# EAGLE board PTSymmetryController (EAGLE 9.5.1)
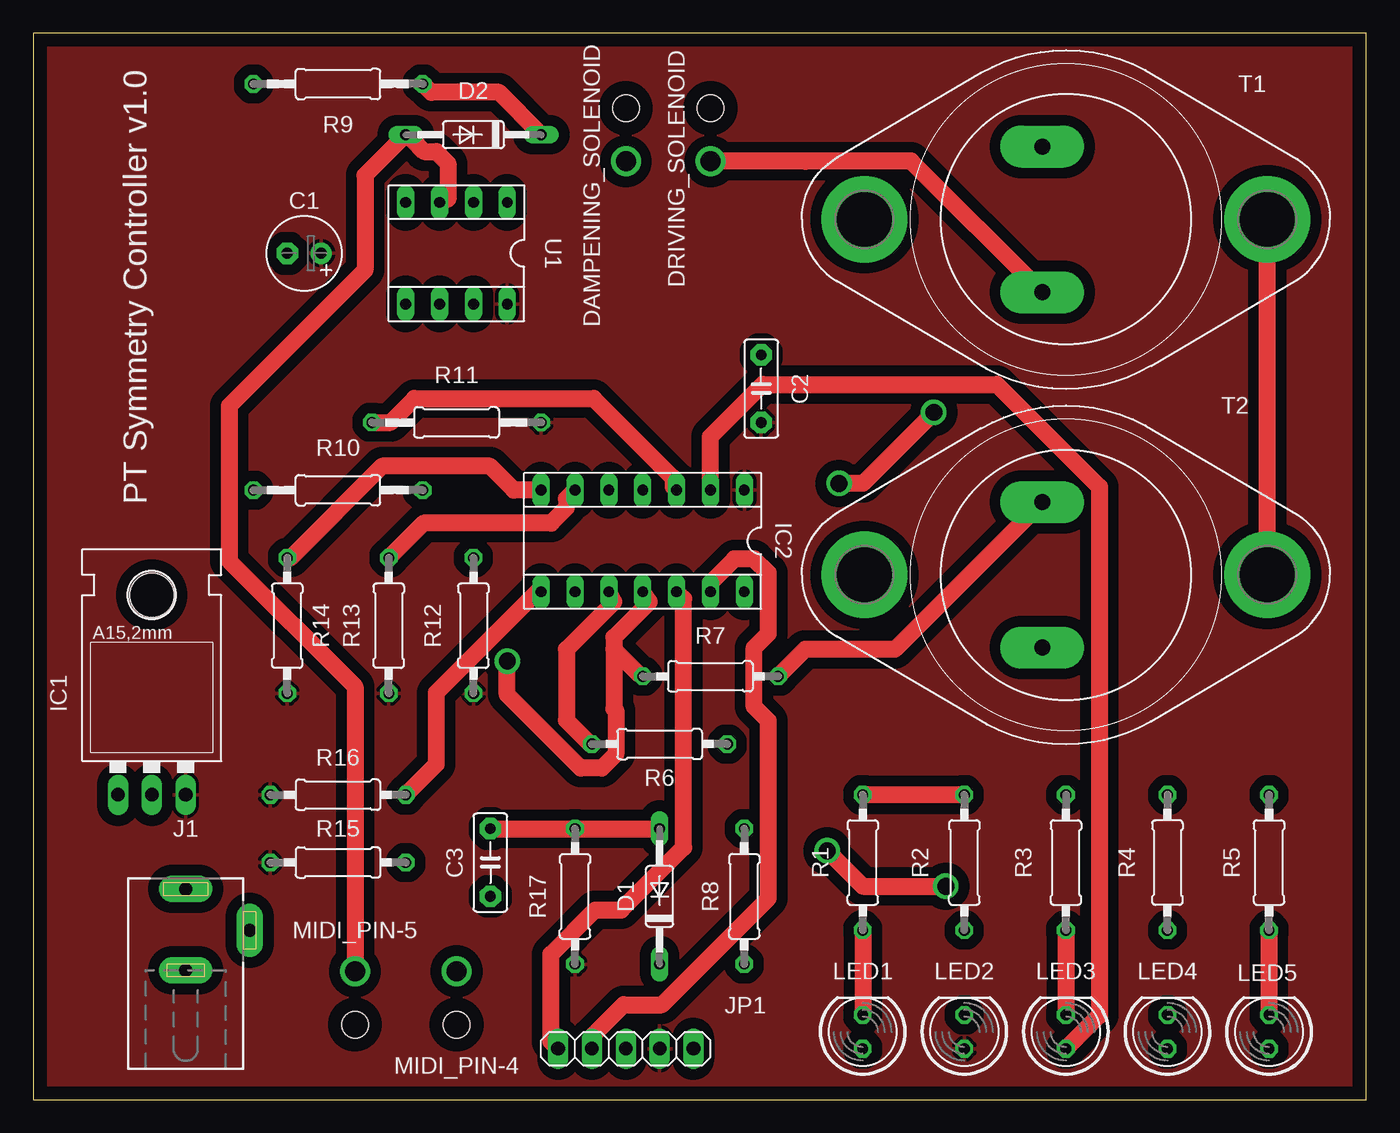
[diagram p0: board, top side]
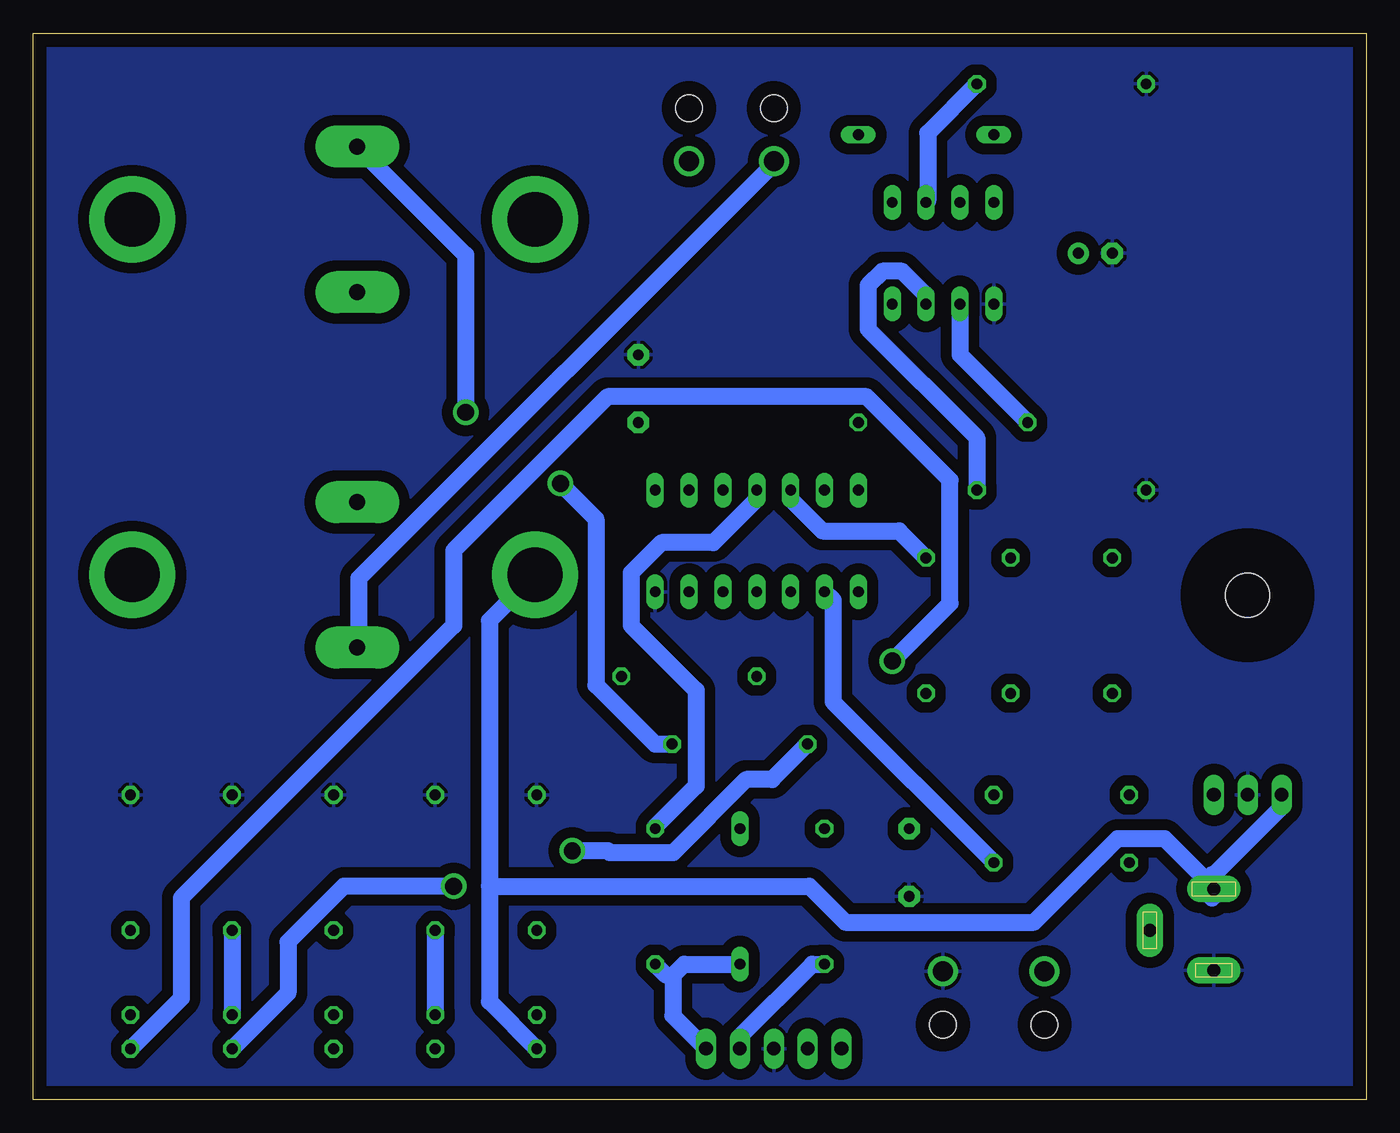
[diagram p1: board, bottom side, seen from below]

Size 100 x 80 mm. Coordinates in mm from the lower left corner, seen from the top.
Outline: 0,0 100,0 100,80 0,80 0,0
Copper layers (1*16): Top 0.035mm / dielectric 1.5mm / Bottom 0.035mm
Design rules "default": minimum track width 6mil, minimum drill 0.35mm, track to track 6mil, track to pad 6mil, pad to pad 6mil, via to via 6mil, smd to smd 6mil, copper to edge 40mil, drill to drill 6mil, minimum pad ring 10mil, minimum via ring 8mil, stop-mask expansion 4mil, vias tented up to drill 0mil, thermal gap 10mil
Net classes: 0 default: width 1.27 mm, drill 1.27 mm, clearance 0.508 mm; 2 signal: width 0.15 mm, drill 0.406 mm, clearance 0.127 mm; 3 ground: width 0.15 mm, drill 0.406 mm, clearance 0.127 mm; 4 3.3V: width 0.15 mm, drill 0.406 mm, clearance 0.127 mm

## Footprints (pad centres in the part's own frame; a part is rotated, then mirrored left to right if it is on the bottom)
SOCKET-08 = drill 0.813 long: 1 -3.81,-3.81; 2 -1.27,-3.81; 3 1.27,-3.81; 4 3.81,-3.81; 5 3.81,3.81; 6 1.27,3.81; 7 -1.27,3.81; 8 -3.81,3.81
E2,5-6 = drill 0.813 pad 1.6: + -1.27,0 | drill 0.813 pad 1.6 octagon: - 1.27,0
C5B2.5 = drill 0.813 pad 1.6 octagon: 1 -2.54,0; 2 2.54,0
DO35-10 = drill 0.813 long: A 5.08,0; C -5.08,0
DOUBLE_THROUGH_HOLE_PAD = drill 1.5: P$1 -2,0 | hole 2: 2,0
78XXL = drill 1.016 long: GND 0,-3.81; IN -2.54,-3.81; OUT 2.54,-3.81 | hole 3.302: 0,11.176
SOCKET-14 = drill 0.813 long: 1 -7.62,-3.81; 2 -5.08,-3.81; 3 -2.54,-3.81; 4 0,-3.81; 5 2.54,-3.81; 6 5.08,-3.81; 7 7.62,-3.81; 8 7.62,3.81; 9 5.08,3.81; 10 2.54,3.81; 11 0,3.81; 12 -2.54,3.81; 13 -5.08,3.81; 14 -7.62,3.81
DCJ0303 = drill 1 pad 2 long: 1 0,3.1; 2 4.8,0; 3 0,-3
1X05 = drill 1.016 long: 1 -5.08,0; 2 -2.54,0; 3 0,0; 4 2.54,0; 5 5.08,0
LED5MM = drill 0.813 octagon: A -1.27,0; K 1.27,0
0207/10 = drill 0.813 octagon: 1 -5.08,0; 2 5.08,0
0207/12 = drill 0.813 octagon: 1 -6.35,0; 2 6.35,0
TO3 = drill 1.194 pad 3.15 long: B -1.778,5.461; E -1.778,-5.461 | drill 4.115 pad 6.477: C 15.113,0; C/ -15.113,0

## Placement (x,y rotation side)
6N138  U1  [SOCKET-08]  31.75,63.5 180 top
C1  2.2u  [E2,5-6]  20.32,63.5 180 top
C2  0.1u  [C5B2.5]  54.61,53.34 270 top
C3  0.1u  [C5B2.5]  34.29,17.78 90 top
D1  1N4148  [DO35-10]  46.99,15.24 90 top
D2  1N4148  [DO35-10]  33.02,72.39 180 top
DAMPENING_SOLENOID  DOUBLE_THROUGH_HOLE_PAD  [DOUBLE_THROUGH_HOLE_PAD]  44.45,72.39 90 top
DRIVING_SOLENOID  DOUBLE_THROUGH_HOLE_PAD  [DOUBLE_THROUGH_HOLE_PAD]  50.8,72.39 90 top
IC1  MIC2954  [78XXL]  8.89,26.67 0 top
IC2  PIC16F18323  [SOCKET-14]  45.72,41.91 180 top
J1  [DCJ0303]  11.43,12.7 0 top
JP1  1x5x2mm-pinheader  [1X05]  44.45,3.81 180 top
LED1  Yellow  [LED5MM]  62.23,5.08 90 top
LED2  Red  [LED5MM]  69.85,5.08 90 top
LED3  Green  [LED5MM]  77.47,5.08 90 top
LED4  Orange  [LED5MM]  85.09,5.08 90 top
LED5  Orange  [LED5MM]  92.71,5.08 90 top
MIDI_PIN-4  DOUBLE_THROUGH_HOLE_PAD  [DOUBLE_THROUGH_HOLE_PAD]  31.75,7.62 270 top
MIDI_PIN-5  DOUBLE_THROUGH_HOLE_PAD  [DOUBLE_THROUGH_HOLE_PAD]  24.13,7.62 270 top
R1  1k  [0207/10]  62.23,17.78 270 top
R2  330  [0207/10]  69.85,17.78 270 top
R3  300  [0207/10]  77.47,17.78 270 top
R4  300  [0207/10]  85.09,17.78 90 top
R5  300  [0207/10]  92.71,17.78 270 top
R6  1k  [0207/10]  46.99,26.67 180 top
R7  1k  [0207/10]  50.8,31.75 180 top
R8  270  [0207/10]  53.34,15.24 270 top
R9  220  [0207/12]  22.86,76.2 0 top
R10  4.7k  [0207/12]  22.86,45.72 0 top
R11  270  [0207/12]  31.75,50.8 180 top
R12  10k  [0207/10]  33.02,35.56 90 top
R13  10k  [0207/10]  26.67,35.56 90 top
R14  10k  [0207/10]  19.05,35.56 90 top
R15  10k  [0207/10]  22.86,17.78 180 top
R16  10k  [0207/10]  22.86,22.86 180 top
R17  10k  [0207/10]  40.64,15.24 270 top
T1  2N3055  [TO3]  77.47,66.04 0 top
T2  2N3055  [TO3]  77.47,39.37 0 top

## Library data of the parts
6N138 IC2 = ic-package
C1 = rcl; SPICEPREFIX: C
C2 C3 = capacitor-wima
D1 D2 = diode
DAMPENING_SOLENOID DRIVING_SOLENOID MIDI_PIN-4 MIDI_PIN-5 = Double-Through-Hole-Pad
IC1 = v-reg
J1 = con-jack; OC_FARNELL: unknown; OC_NEWARK: unknown
JP1 = pinhead
LED1-LED5 = led
R1-R8 R12-R17 = rcl; SPICEPREFIX: R
R9-R11 = resistor
T1 T2 = transistor

## Nets
!MCLR: IC2.4 R8.1
+5V: 6N138.8 C1.+ C2.2 IC1.OUT IC2.1 JP1.2 LED2.A R11.1 R12.1 R13.1 R14.1 R15.2 R16.2 R17.2
+12V: IC1.IN J1.1 LED1.A T1.C T1.C/ T2.C T2.C/
DAMPEN_OUT: IC2.11 LED5.A R7.2
DRIVE_OUT: IC2.10 LED4.A R6.2
GND: 6N138.5 C1.- C2.1 C3.1 IC1.GND IC2.14 J1.3 JP1.3 MIDI_PIN-4.P$1 R1.1 R2.1 R3.1 R4.2 R5.1 R9.1 R10.1
ICSPCLK: IC2.12 JP1.5
ICSPDAT: IC2.13 JP1.4
MIDI_PIN-5: 6N138.3 D2.A MIDI_PIN-5.P$1
N$1: LED1.K R1.2
N$2: LED2.K R2.2
N$3: 6N138.7 R10.2
N$4: LED5.K R5.2
N$5: LED4.K R4.1
N$6: C3.2 D1.A R17.1
N$7: D1.C JP1.1 R8.2
N$8: LED3.K R3.2
N$9: 6N138.2 D2.C R9.2
N$10: IC2.5 R12.2
N$11: IC2.6 R13.2
N$12: IC2.7 R14.2
N$13: DRIVING_SOLENOID.P$1 T1.E
N$14: IC2.9 R15.1
N$15: R6.1 T1.B
N$16: R7.1 T2.B
N$17: IC2.8 R16.1
N$18: DAMPENING_SOLENOID.P$1 T2.E
PIC_INDICATOR: IC2.2 LED3.A
RX_PIN: 6N138.6 IC2.3 R11.2

## Tracks (layer width: path | path; a pad name or v marks a point on that pad's centre or on a via)
!MCLR
  Bottom 1.27: R8.1 53.34,20.45 50.27,23.52 50.27,30.71 55.14,35.59 55.14,39.51 52.87,41.78 48.99,41.78 45.72,45.05 IC2.4
+5V
  Bottom 1.27: JP1.2 46.99,4.73 41.56,10.16 R17.2
  pour Top (isolate 0.813): 0,80.01 0,0 100.33,0 100.33,80.01
+12V
  Top 1.27: T2.C T1.C
  Bottom 1.27: 12,16.45 12.45,16 11.56,15.11 J1.1 | 12,16.45 11.56,16.89 11.4,16.89 6.35,21.94 IC1.IN | 65.79,16 41.78,16 39.08,13.3 24.93,13.3 18.64,19.58 15.14,19.58 12,16.45 | 65.79,16 65.79,7.36 LED1.A | T2.C/ 65.79,35.94 65.79,16
DAMPEN_OUT  (via drill 1.27)
  Top 1.27: 43.56,33.78 45.34,32 R7.2 | 43.56,33.78 43.56,34.67 46.23,37.34 IC2.11 | 43.56,33.78 43.56,29.34 43.71,29.18 43.71,25.92 42.66,24.87 41.07,24.87 35.56,30.38 v35.56,32.89
  Bottom 1.27: LED5.A 88.9,7.61 88.9,15.11 68.45,35.56 68.45,41.19 56.9,52.74 37.49,52.74 31.22,46.47 31.22,37.24 v35.56,32.89
DRIVE_OUT  (via drill 1.27)
  Top 1.27: R6.2 41.78,26.67 40.01,28.45 40.01,33.78 43.56,37.34 IC2.10 | v68.45,16 62.23,16 v59.56,18.67
  Bottom 1.27: v59.56,18.67 56.9,18.67 56.74,18.52 52,18.52 46.52,24 44.58,24 R6.2 | v68.45,16 76.72,16 80.9,11.82 80.9,7.99 LED4.A
GND
  Top 1.27: R2.1 R1.1
  pour Bottom (isolate 0.813): 0,80.01 0,0 100.33,0 100.33,80.01
ICSPCLK
  Top 1.27: JP1.5 38.84,4.34 38.84,10.91 42.15,14.22 44.1,14.22 48.79,18.91 48.79,37.57 IC2.12
ICSPDAT
  Top 1.27: JP1.4 41.91,4.73 44.3,7.11 47.15,7.11 55.14,15.1 55.14,28.42 54.08,29.49 54.08,33.9 55.14,34.97 55.14,39.51 54.09,40.56 52.59,40.56 50.8,38.77 IC2.13
MIDI_PIN-5
  Top 1.27: 6N138.3 31.11,67.56 31.11,70.23 30.23,71.12 29.34,71.12 28.45,72.01 D2.A 24.89,69.34 24.89,62.23 14.71,52.05 14.71,40.41 24.13,30.99 MIDI_PIN-5.P$1
N$1
  Top 1.27: R1.2 LED1.K
N$2
  Bottom 1.27: R2.2 LED2.K
N$3
  Bottom 1.27: 6N138.7 33.02,60.36 34.81,62.15 36.31,62.15 37.36,61.1 37.36,57.81 29.21,49.66 R10.2
N$4
  Top 1.27: R5.2 LED5.K
N$5
  Bottom 1.27: R4.1 LED4.K
N$6
  Top 1.27: C3.2 R17.1 D1.A
N$7
  Bottom 1.27: 52.01,9.34 51.18,10.16 D1.C | R8.2 52.51,9.34 52.01,9.34 | 52.01,9.34 52.01,6.29 JP1.1
N$8
  Top 1.27: R3.2 LED3.K
N$9
  Top 1.27: R9.2 29.84,75.56 34.92,75.56 D2.C
  Bottom 1.27: 6N138.2 32.89,67.44 32.89,72.52 R9.2
N$10
  Bottom 1.27: IC2.5 43.18,45.05 40.8,42.67 35.05,42.67 R12.2
N$11
  Top 1.27: IC2.6 40.01,45.09 40.01,44.41 38.85,43.26 29.29,43.26 R13.2
N$12
  Top 1.27: R14.2 19.3,40.64 26.19,47.52 34.27,47.52 36.07,45.72 IC2.7
N$13
  Top 1.27: T1.E 65.85,70.42 57.98,70.42 57.94,70.39 DRIVING_SOLENOID.P$1
N$14
  Bottom 1.27: IC2.9 40.01,37.47 40.01,29.84 R15.1
N$15  (via drill 1.27)
  Top 1.27: v60.45,46.23 62.23,46.23 v67.56,51.56
  Bottom 1.27: T1.B 67.56,63.37 v67.56,51.56 | v60.45,46.23 57.78,43.56 57.78,31.11 53.35,26.67 R6.1
N$16
  Top 1.27: R7.1 57.91,33.78 64.64,33.78 T2.B
N$17
  Top 1.27: IC2.8 37.8,38.1 30.23,30.52 30.23,25.15 R16.1
N$18
  Bottom 1.27: DAMPENING_SOLENOID.P$1 44.45,70.23 75.56,39.12 75.56,34.04 T2.E
PIC_INDICATOR
  Top 1.27: LED3.A 79.98,6.31 79.98,45.96 72.28,53.66 54.72,53.66 50.8,49.74 IC2.2
RX_PIN
  Top 1.27: IC2.3 48.01,45.97 48.01,46.65 42.05,52.6 28.6,52.6 26.8,50.8 R11.2
  Bottom 1.27: 6N138.6 30.48,55.88 R11.2

## Text on the board
tNames: PT Symmetry Controller v1.0